# EAGLE board Raspberry connector (EAGLE 8.6.0)

Size 647.7 x 87.63 mm. Coordinates in mm from the lower left corner, seen from the top.
Outline: 647.7,3.81 arc-90 643.89,0
Outline: 3.94,11.43 70.1,11.43 arc90 73.79,15.11 73.79,83.69 arc90 69.85,87.63 3.94,87.63 arc90 0,83.69 0,15.37 arc90 3.94,11.43
Outline: circle at 7.9,19.06 radius 1.13
Outline: circle at 3.91,15.33 radius 1.5
Outline: circle at 3.91,83.72 radius 1.5
Outline: circle at 69.88,83.72 radius 1.5
Outline: circle at 69.88,15.33 radius 1.5
Outline: circle at 65.9,19.06 radius 1.13
Outline: circle at 7.9,80.02 radius 1.13
Outline: circle at 65.88,80.02 radius 1.13
Outline: circle at 7.9,57.02 radius 1.13
Outline: circle at 65.88,57.02 radius 1.13
Outline: circle at 7.99,42.04 radius 1.13
Outline: circle at 65.88,42.04 radius 1.13
Outline: circle at 7.9,19.04 radius 1.13
Outline: circle at 65.88,19.04 radius 1.13
Copper layers (1*16): Top 0.035mm / dielectric 1.5mm / Bottom 0.035mm
Design rules "default": minimum track width 6mil, minimum drill 0.35mm, track to track 6mil, track to pad 6mil, pad to pad 6mil, via to via 6mil, smd to smd 6mil, copper to edge 40mil, drill to drill 6mil, minimum pad ring 10mil, minimum via ring 8mil, stop-mask expansion 4mil, vias tented up to drill 0mil, thermal gap 10mil

## Footprints (pad centres in the part's own frame; a part is rotated, then mirrored left to right if it is on the bottom)
2X20 = drill 1.016 octagon: 1 -24.13,-1.27; 2 -24.13,1.27; 3 -21.59,-1.27; 4 -21.59,1.27; 5 -19.05,-1.27; 6 -19.05,1.27; 7 -16.51,-1.27; 8 -16.51,1.27; 9 -13.97,-1.27; 10 -13.97,1.27; 11 -11.43,-1.27; 12 -11.43,1.27; 13 -8.89,-1.27; 14 -8.89,1.27; 15 -6.35,-1.27; 16 -6.35,1.27; 17 -3.81,-1.27; 18 -3.81,1.27; 19 -1.27,-1.27; 20 -1.27,1.27; 21 1.27,-1.27; 22 1.27,1.27; 23 3.81,-1.27; 24 3.81,1.27; 25 6.35,-1.27; 26 6.35,1.27; 27 8.89,-1.27; 28 8.89,1.27; 29 11.43,-1.27; 30 11.43,1.27; 31 13.97,-1.27; 32 13.97,1.27; 33 16.51,-1.27; 34 16.51,1.27; 35 19.05,-1.27; 36 19.05,1.27; 37 21.59,-1.27; 38 21.59,1.27; 39 24.13,-1.27; 40 24.13,1.27
PTSM = smd 1.2 x 3.2: P$1 4.3,8.2; P$2 6.8,8.2; P$3 9.3,8.2; P$4 11.8,8.2 | smd 2.2 x 5.6: PAD 1.1,3.9; PAD2 15.1,3.9

## Placement (x,y rotation side)
JP1  [2X20]  36.51,57.02 0 top
JP2  [2X20]  37.02,42.04 0 top
U$1  PTMS  [PTSM]  27.05,12.7 0 top

## Library data of the parts
JP1 JP2 = adafruit; MPN: 1814634; OC_NEWARK: 14X9424
U$1 = PTSMconnector

## Text on the board
tPlace: Nothing is wired / Mechanical Purposes. | Please place Raspberry through / Headers